# Altium PCB TGCC-HC-1 RF Module.PcbDoc
Units mm, origin at the board's own origin, x right, y up, seen from the top; angles counter-clockwise.
Board outline 152.4 x 101.6 mm, 2 copper layers (Top Layer, Bottom Layer); 27 components, 28 nets, 124 pads, 65 vias.
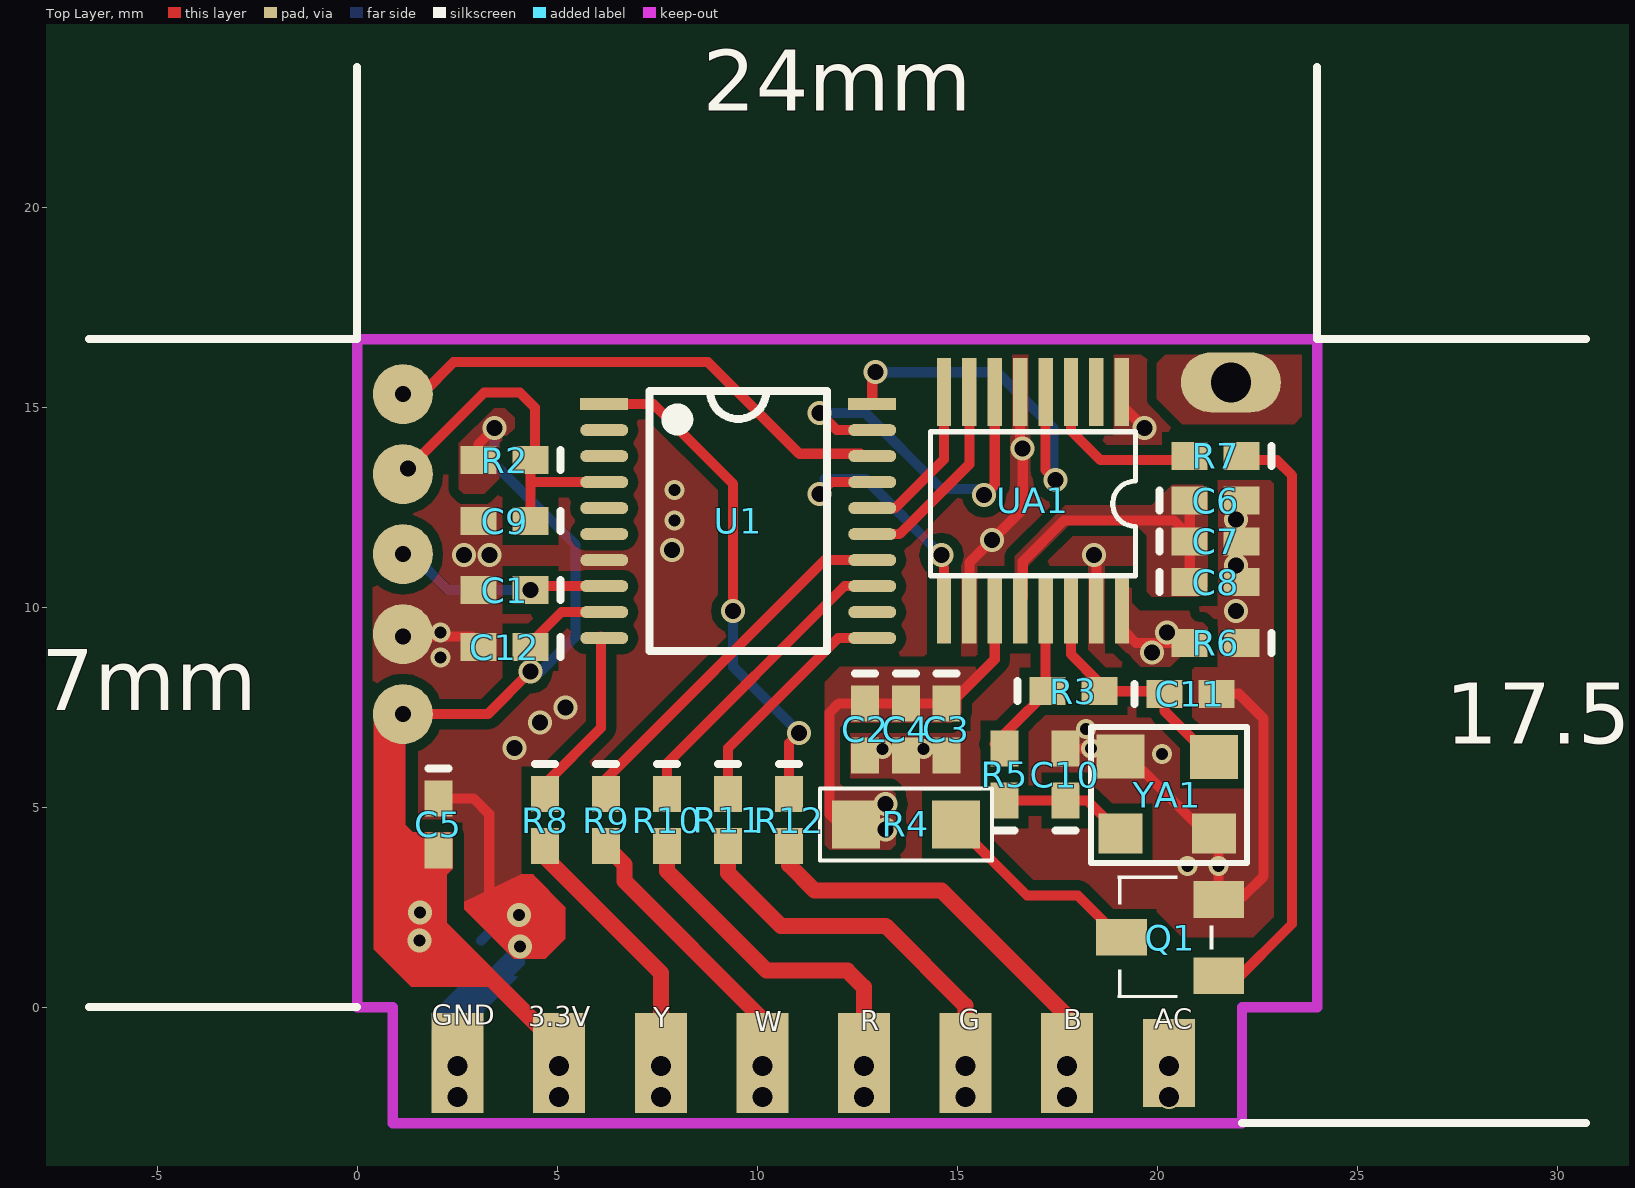
[diagram p0: Top Layer view]
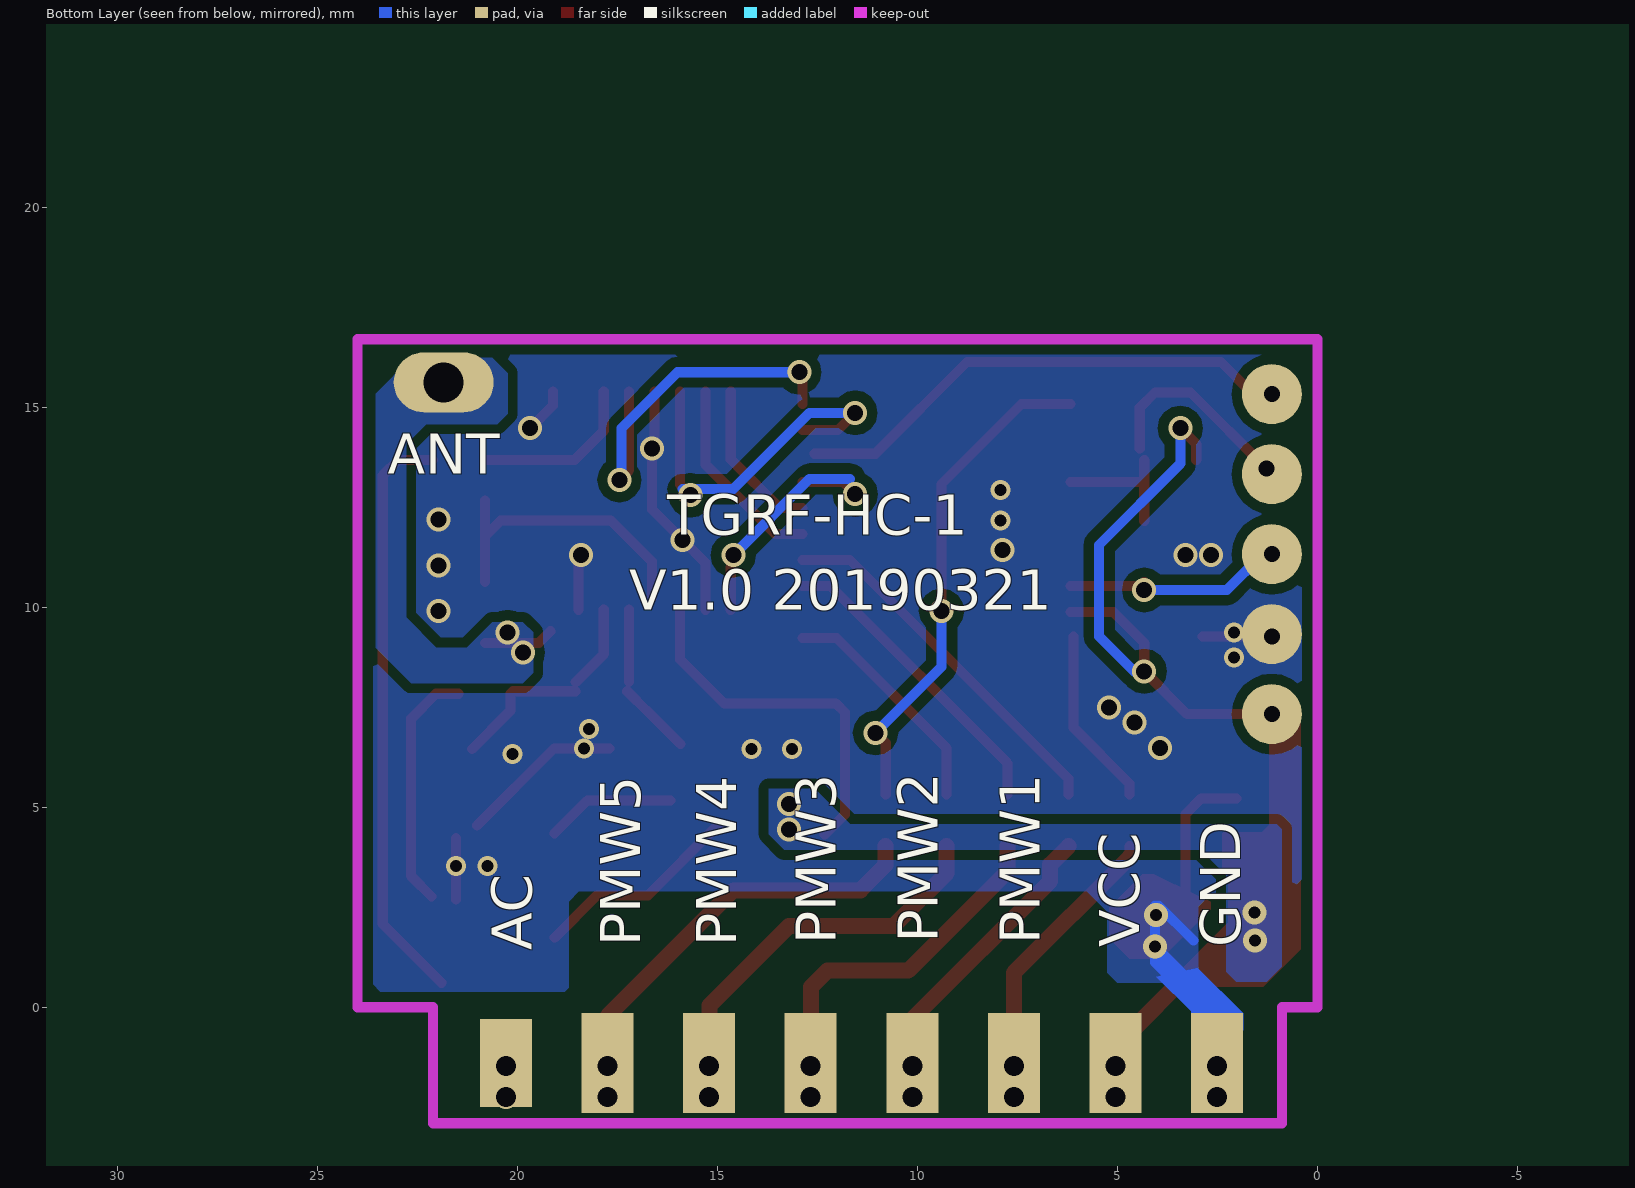
[diagram p1: Bottom Layer view, seen from below]

## Layer stack, top to bottom
Top Solder: solder mask 0.0102, Solder Resist, Dk 3.5
Top Layer: signal copper 0.0356
Dielectric1: dielectric 0.32, FR-4, Dk 4.8
Bottom Layer: signal copper 0.0356
Bottom Solder: solder mask 0.0102, Solder Resist, Dk 3.5

## Board outline
-54.61,-43.218 97.79,-43.218 97.79,58.382 -54.61,58.382

## Design rules (kind name [scope] priority, off if disabled: settings)
Clearance [All] p1: gap=0.254
FabricationTestPointUsage TestPointUsage [All] p1: valid=0 allowmultiple=FALSE
FabricationTestpoint Testpoint [All] p1: side=3 testpointundercomponent=TRUE minsize=1.016 maxsize=2.54 preferedsize=1.524 minholesize=0 maxholesize=1.016 preferedholesize=0.813 testpointgrid=0.025 allowsidetop=TRUE allowsidebottom=TRUE usegrid=TRUE gridtolerance=0
PolygonConnect [All] p1: connectstyle=Direct reliefconductorwidth=0.254 reliefentries=4 polygonreliefangle="90 Angle" airgapwidth=0.254
RoutingVias [All] p1: holewidth=0.711 width=1.27 viastyle="Through Hole" minholewidth=0.711 minwidth=1.27 maxholewidth=0.711 maxwidth=1.27
SolderMaskExpansion [All] p1: expansion=0.102
Width [All] p1: maxlimit=0.8 minlimit=0.2 preferedwidth=0.254
28 further rules are at their usual default settings.

## Components (designator, comment, footprint, x,y, rotation, side; value= is the part's Value field where it differs from the comment)
C1 "2.2uF/50V/0805" 0402 3.683,10.43 r180 top
C2 "47uF" 0402 12.7,6.947 r270 top
C3 "47uF" 0402 14.732,6.947 r270 top
C4 "0.1uF" 0402 13.716,6.947 r270 top
C5 "0.22uF/25V/0805" 0402 2.032,4.572 r270 top
C6 "0.1uF" 0402 21.463,12.662 r0 top
C7 "1nF" 0402 21.463,11.646 r0 top
C8 "1uF" 0402 21.463,10.63 r0 top
C9 "0.22uF/25V/0805" 0402 3.683,12.154 r180 top
C10 "27P" 0402 17.707,5.817 r90 top
C11 "27P" 0402 20.828,7.836 r0 top
C12 "0.22uF/25V/0805" 0402 3.683,9 r180 top
Q1 "NPN" SOT23-3 20.32,1.74 r90 top locked
R2 "10K/0805" 0402 3.683,13.678 r180 top
R3 "680K" 0402 17.907,7.9 r0 top
R4 "10K" 0805-R 13.716,4.572 r180 top
R5 "2.2K" 0402 16.183,5.817 r90 top
R6 "10K" 0402 21.463,9.106 r180 top
R7 "10K" 0402 21.463,13.778 r180 top
R8 "" 0402 4.699,4.676 r270 top
R9 "" 0402 6.223,4.676 r270 top
R10 "" 0402 7.747,4.676 r270 top
R11 "" 0402 9.271,4.676 r270 top
R12 "" 0402 10.795,4.676 r270 top
U1 "" MCU 9.525,12.154 r180 top
UA1 "PL1167_SSOP16" SSOP-16 16.891,12.662 r180 top
YA1 "12M" XTAL-SMD 20.247,5.309 r0 top

## Footprints (in the part's own frame and the unit in brackets; to place one, negate y for a bottom-side part, rotate by r counter-clockwise, add the part's x,y. Pads: shape width x height; smd on the part's side, far side on the other; paste and mask are expansions set on the pad)
0402 [mm] "Chip Capacitor; Body 1.0 x 0.5 mm (LxW typ)"
  rect 0.9x0.7 smd: 1(-0.65,0) 2(0.65,0)
  silkscreen extent -1.4,-0.25 -1.4,0.25
0805-R [mm]
  rect 1.2x1.2 smd: 1(-1.25,0) 2(1.25,0)
  silkscreen extent -2.15,-0.9 2.15,0.9
MCU [mm]
  rect 1.2x0.3 smd: 1(3.35,-2.925) 20(-3.35,-2.925)
  oval 1.2x0.3 smd: 2(3.35,-2.275) 3(3.35,-1.625) 4(3.35,-0.975) 5(3.35,-0.325) 6(3.35,0.325) 7(3.35,0.975) 8(3.35,1.625) 9(3.35,2.275) 10(3.35,2.925) 11(-3.35,2.925) 12(-3.35,2.275) 13(-3.35,1.625) 14(-3.35,0.975) 15(-3.35,0.325) 16(-3.35,-0.325) 17(-3.35,-0.975) 18(-3.35,-1.625) 19(-3.35,-2.275)
  silkscreen extent -2.22,-3.25 2.21,3.25
SOT23-3 [mil]
  rect 36x50 smd: 1(37.5,-47.87) 2(-37.5,-47.87) 3(0.5,47.87)
  silkscreen extent -59,-43 61,52
SSOP-16 [mm]
  rect 0.36x1.7 smd: 1(-2.222,-2.725) 2(-1.587,-2.725) 3(-0.952,-2.725) 4(-0.317,-2.725) 5(0.318,-2.725) 6(0.952,-2.725) 7(1.587,-2.725) 8(2.222,-2.725) 9(2.223,2.725) 10(1.587,2.725) 11(0.953,2.725) 12(0.318,2.725) 13(-0.317,2.725) 14(-0.952,2.725) 15(-1.588,2.725)
  rect 0.35x1.7 smd: 16(-2.223,2.725)
  silkscreen extent -2.56,-1.72 2.56,1.88
XTAL-SMD [mm]
  rect 1.1x1 smd: 1(-1.168,-0.967) 3(1.17,-0.967)
  rect 1.2x1.1 smd: 2(1.17,0.953) 4(-1.17,0.957)
  silkscreen extent -1.9,-1.7 2,1.7

## Part data
C1 C5 C9 C12: library part CAP
C2 C3 C4 C6 C7 C8 C10 C11: library part CAP, "Capacitor"
R2: library part RES2
R3 R4 R5 R6 R7 R8 R9 R10 R11 R12: library part RES1
U1: library part STM8S103
UA1: library part CW1803
YA1: library part CRYSTAL, "Crystal"

## Free pads (board coordinates)
  rect 1.3x2.5 smd: 0(2.509,-1.4) 0(5.049,-1.4) 0(7.589,-1.4) 0(10.129,-1.4) 0(12.669,-1.4) 0(15.209,-1.4) 0(17.749,-1.4)
  rect 1.3x2.5 smd far side: 0(2.509,-1.4) 0(5.049,-1.4) 0(7.589,-1.4) 0(10.129,-1.4) 0(12.669,-1.4) 0(15.209,-1.4) 0(17.749,-1.4)
  rect 1.3x2.5 on Bottom Solder: 0(2.509,-1.4) 0(5.049,-1.4) 0(7.589,-1.4) 0(10.129,-1.4) 0(12.669,-1.4) 0(15.209,-1.4) 0(17.749,-1.4)
  rect 1.3x2.2 smd: 0(20.289,-1.4)
  rect 1.3x2.2 smd far side: 0(20.289,-1.4)
  rect 1.3x2.2 on Bottom Solder: 0(20.289,-1.4)
  round 1.5 smd: 5(1.143,9.328) 6(1.143,7.328) 7(1.143,13.328) 8(1.143,11.328) 9(1.143,15.328)
  oval 2.5x1.5 hole 1: 10(21.844,15.621)
  round 1.5 smd far side: 11(1.143,15.328) 12(1.143,13.328) 13(1.143,11.328) 14(1.143,9.328) 15(1.143,7.328)

## Via types
v1: diameter 0.6, hole 0.4, Top Layer to Bottom Layer, 33 vias
v2: diameter 0.6, hole 0.5, Top Layer to Bottom Layer, tented both sides, 17 vias
v3: diameter 0.5, hole 0.3, Top Layer to Bottom Layer, 11 vias
v4: diameter 0.6, hole 0.3, Top Layer to Bottom Layer, 4 vias

## Nets (pads, with @x,y where several pads share a name; then routed paths per layer and width w, separated by ;. In a path a pad name is that pad's centre, name@x,y a point inside that pad or via, vN(x,y) a via of type N, cw(c..) or ccw(c..) an arc to the next point about the centre after c; other vN are vias at no path point)
+3.3V: C2.1 C3.1 C4.1 C5.2 C12.1 pad.0@5.049,-1.4 pad.6 pad.15 R2.2 R4.2 U1.9 UA1.11 | length 36.7
  Top Layer w0.2: v4(1.558,1.663) 1.558,1.349 2.145,0.762 3.204,0.762 5.049,-1.083 5.049,-1.4 v2(5.049,-1.473) pad.0@5.049,-1.856
  Top Layer w0.254: v4@1.493,1.486 1.493,3.383 C5.2 1.412,3.922 0.936,4.398 0.936,7.121 v1(1.143,7.328) 3.264,7.328 v1(4.333,8.397) C12.1 4.333,9.106 5.106,9.879 U1.9 ; R2.2 3.033,14.082 v1(3.429,14.478) ; R4.2@12.319,4.318 11.811,4.826 11.811,7.366 12.042,7.597 C2.1 C4.1 C3.1 14.836,7.597 15.938,8.699 UA1.11
  Bottom Layer w0.254: v1(3.429,14.478) 3.429,13.589 5.461,11.557 5.461,9.271 4.587,8.397 v1(4.333,8.397)
  other v1: 13.208,4.445 13.208,5.08
  other v2: 5.049,-2.249
  other v4: 1.575,2.373
ANT: pad.10 R6.2 UA1.16 | length 1.8
  Top Layer w0.254: UA1.16@19.177,9.398 19.469,9.106 R6.2
  other v1: 19.866,8.865 20.247,9.373
GND: C1.2 C2.2 C3.2 C4.2 C5.1 C6.2 C7.2 C8.2 C9.2 C10.2 C11.2 C12.2 pad.0@2.509,-1.4 pad.5 pad.14 Q1.1 R6.1 U1.7 UA1.1 UA1.5 UA1.10 UA1.15 YA1.3 YA1.4 | length 29.2
  Top Layer w0.254: pad.5@1.27,9.271 C12.2@2.868,9.271 ; C5.1 2.906,5.222 3.302,4.826 3.302,2.794 ; UA1.10 15.304,11.113 v1(15.875,11.684) 16.637,12.446 v1(16.637,13.97) 16.573,14.034 UA1.5 ; C10.2 v3(18.342,6.467) 19.089,6.467 YA1.3@21.009,4.547 ; UA1.15 v1@18.479,11.239 ; UA1.1 19.113,15.05 v1(19.685,14.478) ; C11.2 22.038,7.836 22.66,7.214 22.66,3.277 Q1.1@22.152,2.769 ; Q1.1 v3(21.536,3.531) YA1.3@21.536,4.222
  Bottom Layer w0.254: pad.0@2.503,-1.473 2.503,-0.44 4.064,1.121 v4(4.064,1.524) 3.911,1.371 v4@3.911,1.291
  other v1: 3.937,6.477 4.572,7.112 5.207,7.493 1.143,9.271 21.971,9.906 21.971,11.049 2.667,11.303 3.302,11.303 18.415,11.303 7.874,11.43 21.971,12.192
  other v2: 2.509,-1.473
  other v3: 20.755,3.531 20.12,6.325 13.135,6.452 14.151,6.452 18.215,6.96 2.086,8.738 2.086,9.373 7.928,12.167 7.928,12.929
  other v4: 4.043,2.305
NetC6_1: C6.1 C7.1 C8.1 UA1.12 | length 7.7
  Top Layer w0.254: UA1.12@16.637,10.249 16.637,11.138 17.666,12.167 20.419,12.167 C7.1@20.813,11.773 ; C8.1 C6.1
NetC10_1: C10.1 R5.1 YA1.1 | length 3.2
  Top Layer w0.254: R5.1 18.253,5.167 YA1.1
NetCN1_3: R8.2 | length 7.1
  Top Layer w0.254: R8.2@4.699,3.751 R8.2
  Top Layer w0.4: R8.2@4.699,3.751 7.592,0.858 7.592,-1.922
  other v2: 7.589,-2.249 7.589,-1.473
NetCN1_4: pad.0@10.129,-1.4 R9.2 | length 7
  Top Layer w0.4: R9.2 6.684,3.565 6.684,3.15 10.129,-0.295 pad.0@10.129,-1.4
  other v2: 10.129,-2.249 10.129,-1.473
NetCN1_5: pad.0@12.669,-1.4 R10.2 | length 8.7
  Top Layer w0.4: R10.2 7.747,3.404 10.234,0.917 12.253,0.917 12.667,0.503 pad.0@12.667,-1.473
  other v2: 12.669,-2.249 12.669,-1.473
NetCN1_6: pad.0@15.209,-1.4 R11.2 | length 9.5
  Top Layer w0.254: R11.2 R11.2@9.309,4.026
  Top Layer w0.4: R11.2 9.271,3.353 10.592,2.032 13.208,2.032 15.203,0.037 pad.0@15.203,-1.473
  other v2: 15.209,-2.249 15.209,-1.473
NetCN1_7: R12.2 | length 10.2
  Top Layer w0.4: R12.2 10.795,3.556 11.43,2.921 14.605,2.921 17.743,-0.217 v2@17.743,-1.473
  other v2: 17.749,-1.473
NetQ1_2: Q1.2 R7.1 | length 14.7
  Top Layer w0.254: Q1.2@21.898,0.61 23.368,2.08 23.368,13.297 22.987,13.678 R7.1@22.113,13.678
NetQ1_3: Q1.3 R4.1 | length 5.3
  Top Layer w0.254: R4.1 16.744,2.794 18.016,2.794 Q1.3@19.07,1.74
NRST: C9.1 pad.7 pad.12 R2.1 U1.4 | length 8.5
  Top Layer w0.254: v1(1.27,13.462) 3.175,15.367 4.064,15.367 4.445,14.986 R2.1@4.445,13.97 ; C9.1 R2.1 ; 4.381,13.129 U1.4
PKT: R7.2 UA1.3 | length 4.2
  Top Layer w0.254: UA1.3 17.843,14.415 18.58,13.678 R7.2@20.813,13.678
PWM1: R8.1 U1.10 | length 4.5
  Top Layer w0.254: R8.1 4.699,5.588 6.096,6.985 U1.10@6.096,9.271
PWM2: R9.1 U1.14 | length 9.3
  Top Layer w0.254: R9.1 6.223,5.715 11.687,11.179 U1.14
PWM3: R10.1 U1.13 | length 7.7
  Top Layer w0.254: R10.1 7.747,6.096 12.18,10.529 U1.13
PWM4: R11.1 U1.11 | length 5.9
  Top Layer w0.254: R11.1 9.271,6.477 12.023,9.229 U1.11
PWM5: R12.1 U1.1 | length 12.6
  Top Layer w0.254: U1.1 7.4,15.079 9.398,13.081 v1(9.398,9.906) ; R12.1 10.795,6.604 v1(11.049,6.858)
  Bottom Layer w0.254: v1(9.398,9.906) 9.398,8.509 v1(11.049,6.858)
RF_CLK: U1.15 UA1.7 | length 5
  Top Layer w0.254: U1.15 13.559,11.829 15.304,13.573 UA1.7
RF_MISO: U1.17 UA1.9 | length 6.2
  Top Layer w0.254: v1(11.557,12.827) 11.859,13.129 U1.17 ; UA1.9 14.668,10.985
  Bottom Layer w0.254: 11.684,13.208 12.7,13.208 v1(14.605,11.303)
RF_MOSI: U1.16 UA1.8 | length 4
  Top Layer w0.254: U1.16 13.447,12.479 14.669,13.7 UA1.8
RF_RST: U1.20 UA1.4 | length 9.6
  Top Layer w0.254: U1.20 12.875,15.796 v1(12.954,15.875) ; UA1.4 17.208,13.427 v1(17.453,13.183)
  Bottom Layer w0.254: v1(12.954,15.875) 16.002,15.875 17.399,14.478 v1@17.399,13.081
RF_SS: U1.19 UA1.6 | length 9.3
  Top Layer w0.254: v1(11.557,14.859) 11.987,14.429 U1.19 ; v1(15.675,12.802) 15.939,13.065 UA1.6
  Bottom Layer w0.254: v1(11.557,14.859) 12.7,14.859 14.605,12.954 v1@15.875,12.954
SWIM: pad.9 pad.11 U1.18 | length 12.7
  Top Layer w0.254: v1(1.143,15.328) 1.612,15.328 2.413,16.129 8.763,16.129 11.054,13.838 U1.18@12.578,13.838
VCAP: C1.1 pad.8 pad.13 U1.8 | length 5.2
  Top Layer w0.254: C1.1@4.333,10.63 4.434,10.529 U1.8
  Bottom Layer w0.254: pad.13@1.397,11.303 2.27,10.43 v1(4.333,10.43)
  other v1: 1.143,11.328
XTALI: C11.1 R3.2 UA1.14 YA1.2 | length 5.4
  Top Layer w0.254: UA1.14 17.843,8.827 R3.2@18.542,8.128 ; R3.2 C11.1@20.114,7.9 ; C11.1 20.178,7.41 YA1.2@21.136,6.452
XTALO: R3.1 R5.2 UA1.13 | length 3.7
  Top Layer w0.254: R5.2@15.929,6.579 16.764,7.414 16.764,7.407 R3.1 ; R3.1@17.208,8.139 UA1.13
pads on no net: U1.2 U1.3 U1.5 U1.6 U1.12 UA1.2
copper on no net: | length 17.2
  Top Layer w0.2: 23.989,16.7 24,16.7
  Top Layer w0.254: 7.589,-1.856 7.589,-0.58
  Top Layer w0.4: 7.583,-1.473 7.583,-0.586 ; 10.129,-1.856 10.129,-0.671
  Bottom Layer w0.254: 3.102,1.667 3.975,2.54 4.064,2.54 4.064,1.425 2.509,-0.13 2.509,-1.856 ; 3.621,0.863 2.711,-0.047 2.711,-0.483 2.711,-0.334 2.509,-0.536 2.509,-1.856 ; 4.064,1.524 2.509,-0.031 2.509,-1.856
  other v2: 2.509,-2.249 2.509,-2.249 17.749,-2.249 20.289,-2.249 20.289,-1.473

## Polygon pours and split planes (outlines as drawn)
ANT on Top Layer "Top Layer-No Net 1" (solid, pour order 1023): 19.358,10.477 19.358,10.106 19.558,9.906 20.857,9.906 21.136,9.627 21.136,8.944 20.955,8.763 20.574,8.763 20.32,8.509 19.587,8.509 18.977,9.119 18.977,10.096 19.358,10.477
GND on Top Layer "Top Layer-No Net 1" (solid, remove dead copper, pour order 1021): 3.864,2.388 19.993,2.388 20.628,1.753 22.152,1.753 22.914,2.515 22.914,14.922 21.136,16.7 0.904,16.7 0.181,15.977 0.181,3.531 1.07,2.642 3.454,2.642 3.695,2.401
GND on Top Layer "Top Layer-No Net 1" (solid, pour order 1009): 2.413,6.731 2.54,6.858 3.302,6.858 3.429,6.858 4.318,7.747 4.445,7.874 4.699,7.874 5.588,7.874 5.715,7.747 5.715,7.366 4.572,6.223 4.191,6.223 3.937,5.969 3.683,5.715 2.286,5.715 2.286,6.604 2.413,6.731
GND on Top Layer "Top Layer-No Net 1" (solid, pour order 1000): 21.717,12.7 21.717,8.89 21.844,8.763 22.606,8.763 22.606,12.827 22.479,12.954 21.971,12.954 21.717,12.7
GND on Top Layer "Top Layer-No Net 1" (solid, pour order 1001): 1.143,10.033 2.032,10.033 2.286,10.287 2.286,12.446 2.413,12.573 3.429,12.573 3.556,12.446 3.556,8.763 3.302,8.509 0.889,8.509 0.635,8.763 0.635,9.525 1.143,10.033
+3.3V on Top Layer "Top Layer-No Net 1" (solid, pour order 1002): 2.667,12.827 3.175,12.827 3.556,13.208 3.556,14.097 3.937,14.478 3.937,14.732 3.683,14.986 3.429,14.986 2.54,14.097 2.54,12.954 2.667,12.827
GND on Top Layer "Top Layer-No Net 1" (solid, pour order 1003): 6.35,11.303 5.334,11.303 5.08,11.557 3.683,11.557 3.429,11.811 3.175,11.811 2.667,11.303 2.667,11.176 3.429,10.414 3.429,10.795 3.683,11.049 5.842,11.049 5.969,11.176
GND on Top Layer "Top Layer-No Net 1" (solid, pour order 1004): 5.954,11.303 6.985,11.303 7.493,11.811 8.001,11.811 8.128,11.684 8.128,11.176 8.001,11.049 6.103,11.049 5.974,11.178
+3.3V on Top Layer "Top Layer-No Net 1" (solid, pour order 1005): 15.113,7.366 15.113,8.001 15.621,8.509 12.065,8.509 11.684,8.128 11.684,6.985 11.811,6.858 11.938,6.858 12.192,7.112 14.859,7.112 15.113,7.366
+3.3V on Top Layer "Top Layer-No Net 1" (solid, pour order 1006): 12.065,7.239 12.065,5.588 12.192,5.461 13.335,5.461 13.462,5.334 13.462,4.064 13.335,3.937 11.811,3.937 11.684,4.064 11.684,7.493 12.065,7.874
ANT on Top Layer "Top Layer-No Net 1" (solid, pour order 1010): 20.374,16.485 23.422,16.485 23.676,16.231 23.676,14.834 23.422,14.58 20.628,14.58 19.993,15.215 19.993,16.104 20.374,16.485
ANT on Top Layer "Top Layer-No Net 1" (solid, pour order 1011): 19.358,10.643 19.358,9.881 19.612,9.627 21.136,9.627 21.263,9.5 21.263,8.992 21.136,8.865 19.231,8.865 18.977,9.119 18.977,10.262 19.358,10.643
NetC6_1 on Top Layer "Top Layer-No Net 1" (solid, pour order 1012): 16.437,9.5 16.437,11.278 17.707,12.548 19.866,12.548 20.374,13.056 21.136,13.056 21.263,12.929 21.263,10.516 21.009,10.262 19.866,10.262 19.739,10.389 19.739,11.786 19.358,12.167 17.907,12.167 16.637,10.897
GND on Top Layer "Top Layer-No Net 1" (solid, pour order 1018): 17.58,7.087 19.612,7.087 19.866,6.833 19.866,5.944 20.628,5.182 22.406,5.182 22.66,5.436 22.66,4.801 22.914,4.547 22.914,2.261 22.406,1.753 20.882,1.753 20.628,1.753 20.374,2.007 20.374,4.801 19.866,5.309 18.85,5.309 18.469,5.69 18.215,5.944 17.326,5.944 17.199,6.071 17.199,6.706 17.58,7.087
GND on Top Layer "Top Layer-No Net 1" (solid, pour order 1019): 22.479,12.954 22.508,12.954 22.914,12.548 22.914,2.261 22.406,1.753 22.025,1.753 21.517,2.261 21.517,4.293 22.406,5.182 22.406,7.087 22.025,7.468 21.136,7.468 21.009,7.595 21.009,7.976 21.644,8.611 21.644,12.627 21.844,12.827
GND on Top Layer "Top Layer-No Net 1" (solid, pour order 1020): 12.373,6.833 15.294,6.833 15.421,6.706 15.421,5.817 15.294,5.69 12.373,5.69 12.246,5.817 12.246,6.706 12.373,6.833
+3.3V on Bottom Layer "Top Layer-No Net 1" (solid, pour order 1024): 0.889,1.778 0.889,4.445 1.016,4.572 11.684,4.572 12.573,5.461 13.716,5.461 13.716,4.318 13.335,3.937 2.921,3.937 2.286,3.302 2.286,1.278 1.817,0.809 1.096,0.809 0.889,1.016
ANT on Bottom Layer "Top Layer-No Net 1" (solid, pour order 1025): 20.628,16.231 22.66,16.231 23.549,15.342 23.549,8.992 22.66,8.103 19.866,8.103 19.612,8.357 19.612,9.373 19.866,9.627 20.628,9.627 21.263,8.992 22.025,8.992 22.787,9.754 22.787,14.072 22.279,14.58 20.501,14.58 20.247,14.834 20.247,15.85 20.628,16.231
GND on Bottom Layer "Top Layer-No Net 1" (solid, remove dead copper, pour order 1031): 2.975,0.991 2.975,2.515 2.721,2.769 0.816,2.769 0.181,3.404 0.181,15.303 1.578,16.7 22.515,16.7 24,15.215 24,0.959 23.239,0.198 19.008,0.198 18.723,0.483 18.723,0.864 5.261,0.864 5.007,0.61 3.356,0.61

## Keep-outs
Keep-Out Layer:
  lines w0.1: 0.889,-0.056 0.909,-0.056
  lines w0.254: 0,0 0.889,0 0.889,-0.056 0.889,-2.9 22.116,-2.9 22.116,0 24,0 24,16.7 0,16.7 0,0

## Other copper
Top Layer:
  region net +3.3V: 0.415,2.119 0.414,2.12 0.414,7.303 0.468,7.357 0.962,6.863 1.196,6.863 1.196,6.79 1.275,6.711 1.202,6.638 1.202,4.565 1.394,4.373 2.359,4.373 2.384,4.348 2.384,3.466 2.233,3.315 2.233,1.957
  region net +3.3V: 2.226,2.119 0.415,2.119 0.415,1.445 1.352,0.508 3.266,0.508 4.445,-0.671 4.445,-0.762 4.771,-0.762 4.939,-0.594 3.414,0.931
  region net GND: 2.672,2.642 2.672,2.449 3.908,1.213 4.702,1.213 5.201,1.712 5.201,2.505 4.384,3.322 4.095,3.322
Bottom Layer:
  region net GND: 2.975,0.991 2.975,0.961 1.859,-0.15 1.859,-0.573 2.92,-0.573 2.955,-0.608 3.159,-0.404 3.159,-0.104 4.029,0.766

## Silkscreen, mask and mechanical layers (free items; w line width, h text height)
Top Overlay:
  lines w0.2: -6.711,0 0,0 ; -6.711,16.7 0,16.7 0,23.511 ; 22.116,-2.9 30.718,-2.9 ; 23.989,16.7 23.989,23.511 ; 24,16.7 30.718,16.7
  text "24mm" at 8.642,22.407 h1.52
  text "13.7mm" at -11.218,7.43 h1.52
  text "17.5mm" at 27.201,6.592 h1.52
  text "GND" at 1.868,-0.441 h0.5
  text "3.3V" at 4.276,-0.479 h0.5
  text "Y" at 7.403,-0.505 h0.5
  text "G" at 15.039,-0.556 h0.5
  text "B" at 17.648,-0.556 h0.5
  text "AC" at 19.929,-0.54 h0.5
  text "R" at 12.57,-0.572 h0.5
  text "W" at 9.941,-0.603 h0.5
Bottom Overlay:
  text "ANT" at 23.241,13.335 h1
  text "TGRF-HC-1" at 16.256,11.811 h1
  text "V1.0 20190321" at 17.208,9.937 h1
  text "PMW2" at 9.493,1.611 h1 r270
  text "PMW1" at 6.944,1.569 h1 r270
  text "PMW3" at 12.041,1.569 h1 r270
  text "PMW4" at 14.527,1.526 h1 r270
  text "PMW5" at 16.928,1.526 h1 r270
  text "GND" at 1.93,1.505 h1 r270
  text "VCC" at 4.458,1.505 h1 r270
  text "AC" at 19.646,1.421 h1 r270